# Altium PCB PWM_Controller_Half_Bridge.PcbDoc
Units mm, origin at the board's own origin, x right, y up, seen from the top; angles counter-clockwise.
Board outline 45 x 40 mm, 2 copper layers (Top Layer, Bottom Layer), stack 1.071 mm thick; 62 components, 23 nets, 137 pads, 15 vias.
Unrouted connection lines stored in the file: 29.
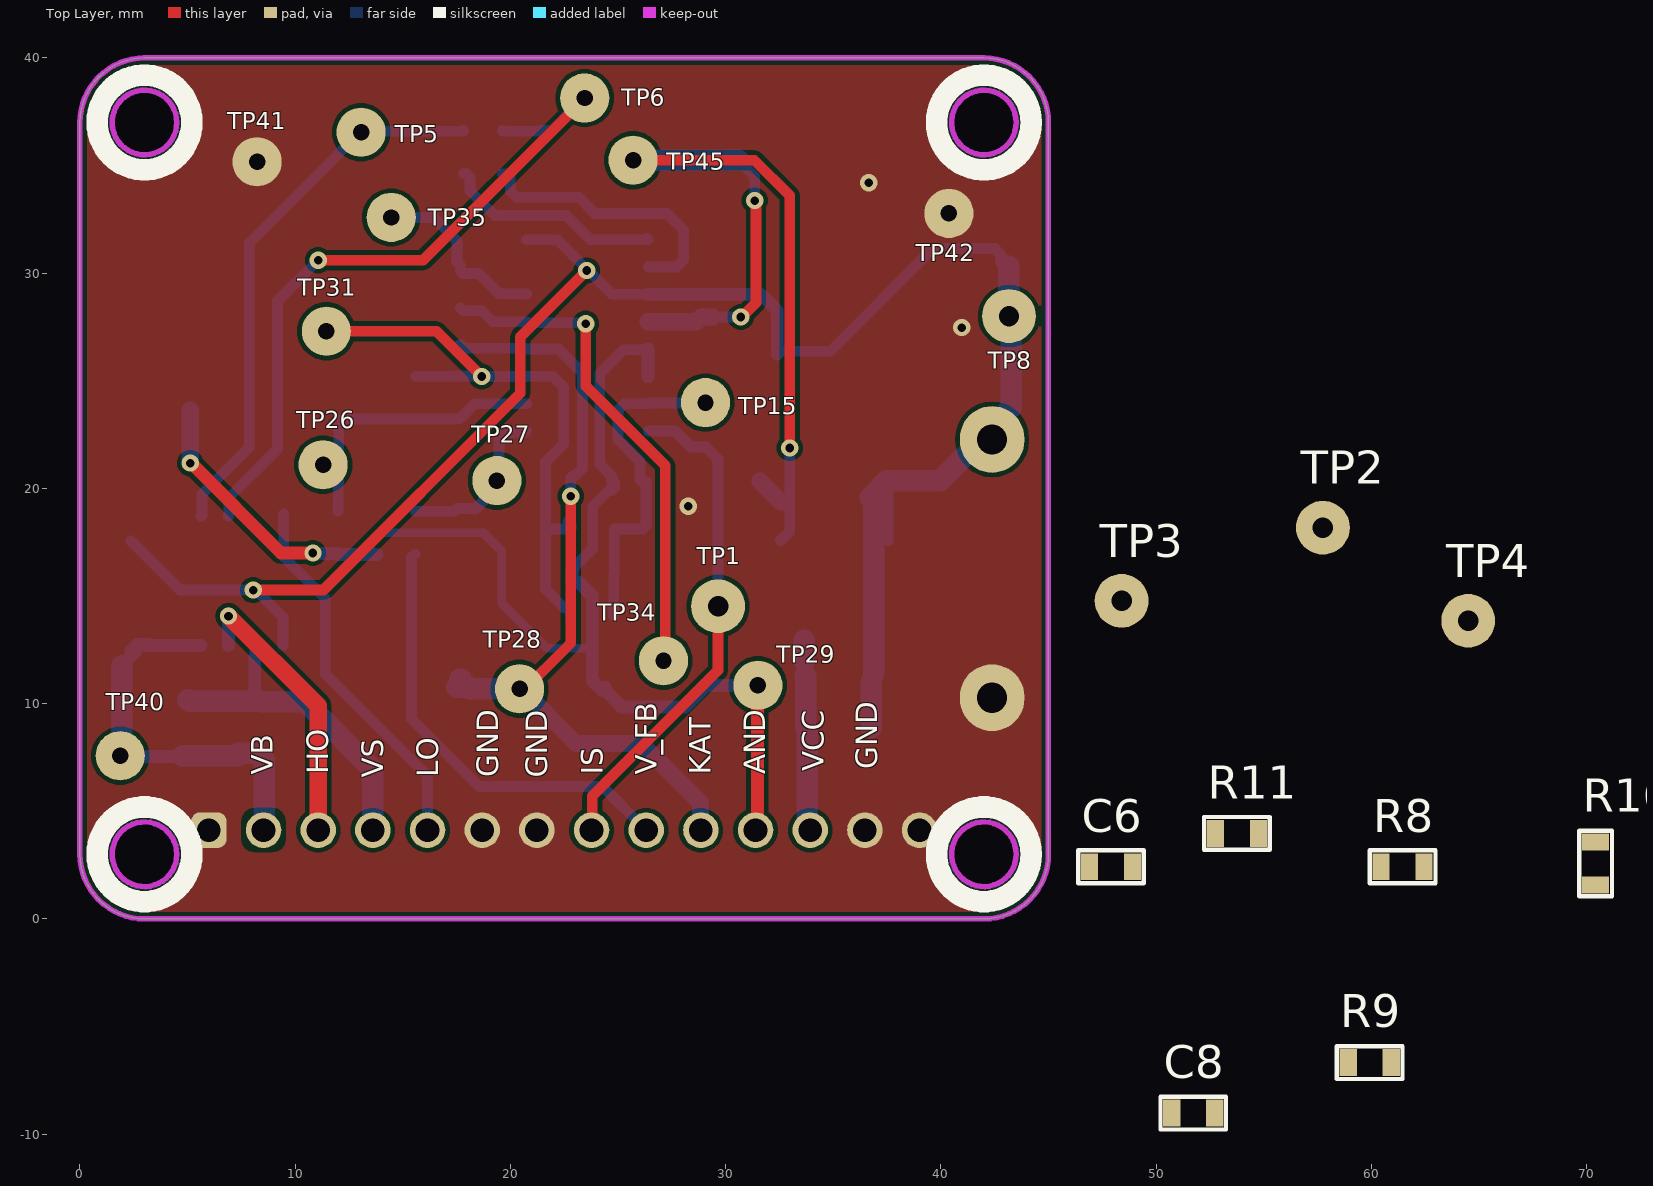
[diagram p0: Top Layer view]
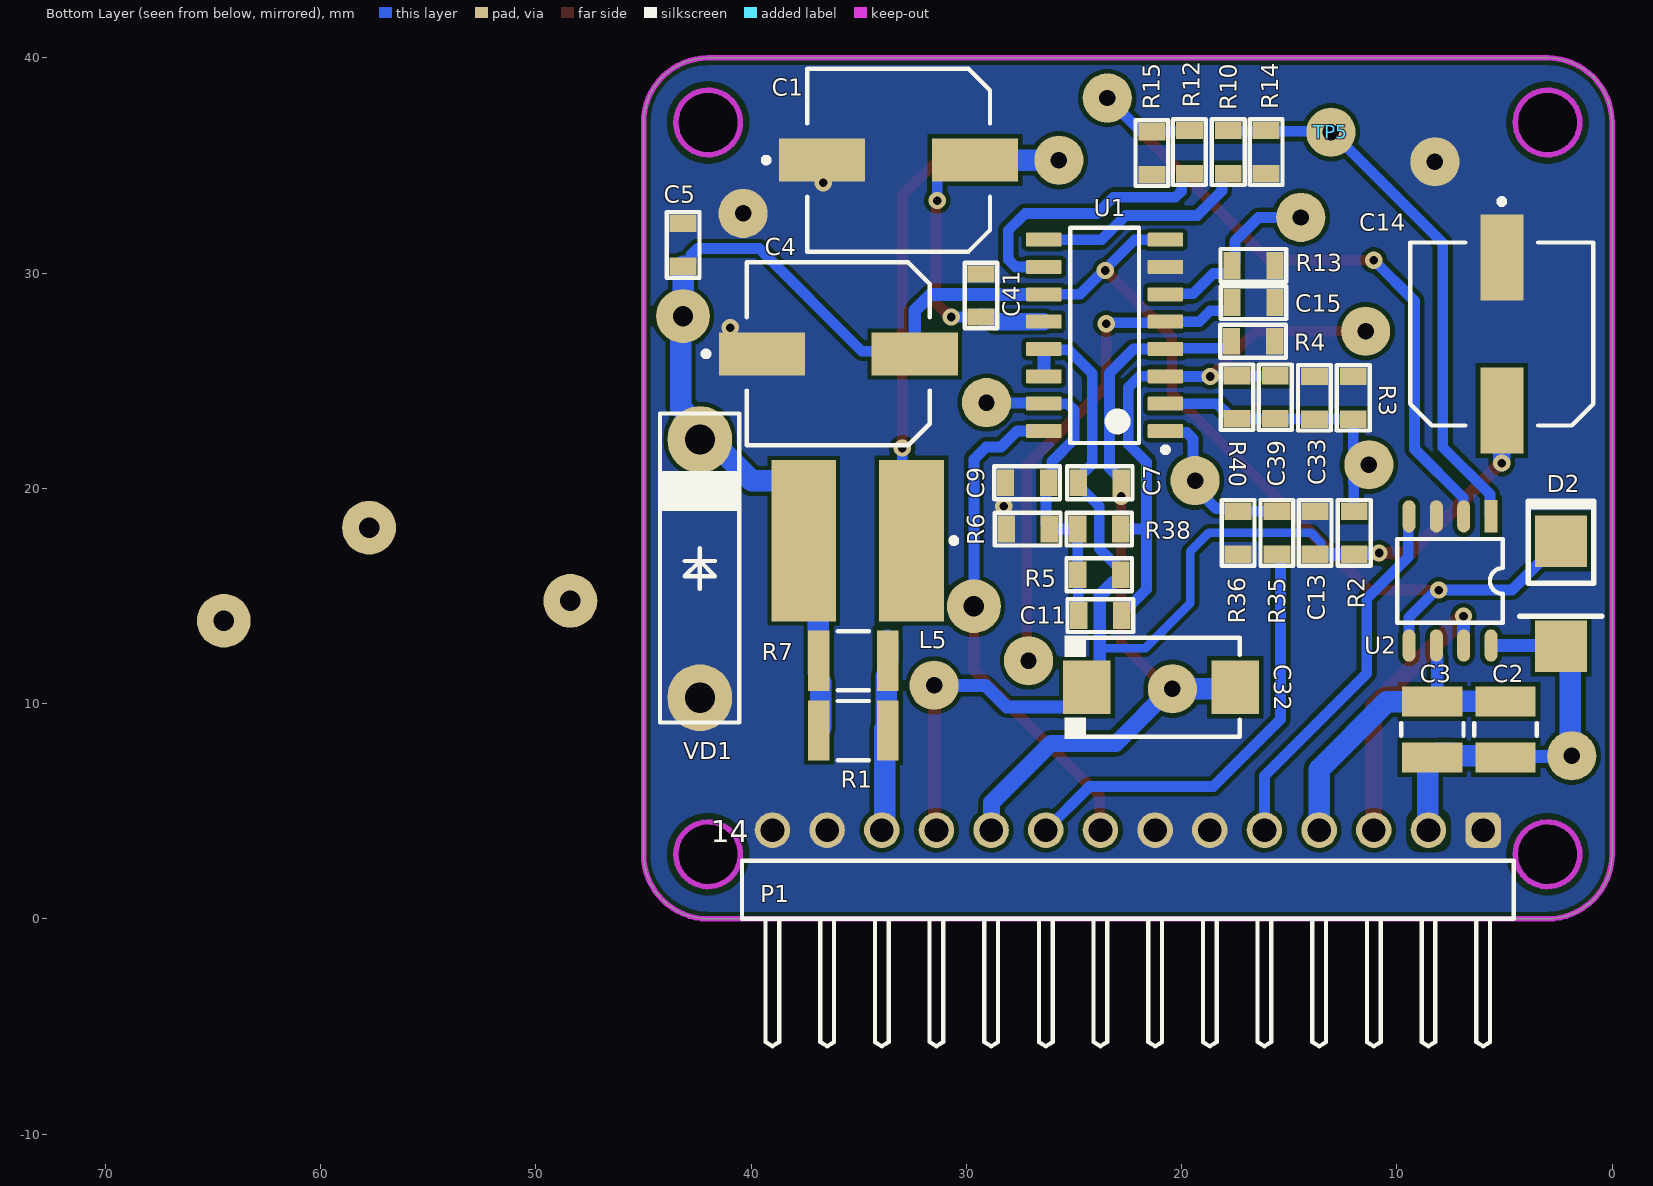
[diagram p1: Bottom Layer view, seen from below]

## Layer stack, top to bottom
Top Solder: solder mask 0.0102, Solder Resist, Dk 3.5
Top Layer: signal copper 0.0356
Dielectric 1: dielectric 1, FR-4, Dk 4.8
Bottom Layer: signal copper 0.0356
Bottom Solder: solder mask 0.0102, Solder Resist, Dk 3.5

## Board outline
0,3 0,37 cw(c3,37) 3,40 42,40 cw(c42,37) 45,37 45,3.05 45,3 cw(c42,3) 42,0 42.029,0 2.999,0 3,0 cw(c3,3)
cut-out: 40.5,3 ccw(c42,3) 42,1.5 ccw(c42,3) 43.5,3 ccw(c42,3) 42,4.5 ccw(c42,3)
cut-out: 1.5,3 ccw(c3,3) 3,1.5 ccw(c3,3) 4.5,3 ccw(c3,3) 3,4.5 ccw(c3,3)
cut-out: 1.5,37 ccw(c3,37) 3,35.5 ccw(c3,37) 4.5,37 ccw(c3,37) 3,38.5 ccw(c3,37)
cut-out: 40.5,37 ccw(c42,37) 42,35.5 ccw(c42,37) 43.5,37 ccw(c42,37) 42,38.5 ccw(c42,37)

## Design rules (kind name [scope] priority, off if disabled: settings)
Clearance Clearance_1 [All vs InNet('GND_1')] p1: gap=0.2 ignorepadtopadclearanceinfootprint=FALSE
Clearance [All vs InNet('GND')] p2: gap=0.2 ignorepadtopadclearanceinfootprint=FALSE except(0.4: Fill-Fill Fill-Poly Fill-Region Fill-Text Fill-Hole Poly-Poly Poly-Region Poly-Text Poly-Hole Region-Region Region-Text Region-Hole)
ComponentClearance [All] p1: gap=-3 collisioncheckmode=3 verticalgap=0.254 showdistances=FALSE
DiffPairsRouting [All] p1: maxlimit=0.254 minlimit=0.254 mostfreqgap=0.254 substack1={A23D90DD-733B-49C5-8102-56B3D284E3A0} toplayer_{a23d90dd-733b-49c5-8102-56b3d284e3a0}_minwidth=0.381 toplayer_{a23d90dd-733b-49c5-8102-56b3d284e3a0}_maxwidth=0.381 toplayer_{a23d90dd-733b-49c5-8102-56b3d284e3a0}_prefwidth=0.381 bottomlayer_{a23d90dd-733b-49c5-8102-56b3d284e3a0}_minwidth=0.381 bottomlayer_{a23d90dd-733b-49c5-8102-56b3d284e3a0}_maxwidth=0.381 bottomlayer_{a23d90dd-733b-49c5-8102-56b3d284e3a0}_prefwidth=0.381 toplayer_minwidth=0.381 toplayer_maxwidth=0.381 toplayer_prefwidth=0.381 bottomlayer_minwidth=0.381 bottomlayer_maxwidth=0.381 bottomlayer_prefwidth=0.381 substack2={0B3DB408-A969-412D-8C07-BA8AE97219D9} toplayer_{0b3db408-a969-412d-8c07-ba8ae97219d9}_minwidth=0.381 toplayer_{0b3db408-a969-412d-8c07-ba8ae97219d9}_maxwidth=0.381 toplayer_{0b3db408-a969-412d-8c07-ba8ae97219d9}_prefwidth=0.381 bottomlayer_{0b3db408-a969-412d-8c07-ba8ae97219d9}_minwidth=0.381 bottomlayer_{0b3db408-a969-412d-8c07-ba8ae97219d9}_maxwidth=0.381 bottomlayer_{0b3db408-a969-412d-8c07-ba8ae97219d9}_prefwidth=0.381 substack3={378827E6-B38F-4565-9D2F-710D8D441C30} toplayer_{378827e6-b38f-4565-9d2f-710d8d441c30}_minwidth=0.381 toplayer_{378827e6-b38f-4565-9d2f-710d8d441c30}_maxwidth=0.381 toplayer_{378827e6-b38f-4565-9d2f-710d8d441c30}_prefwidth=0.381 bottomlayer_{378827e6-b38f-4565-9d2f-710d8d441c30}_minwidth=0.381 bottomlayer_{378827e6-b38f-4565-9d2f-710d8d441c30}_maxwidth=0.381 bottomlayer_{378827e6-b38f-4565-9d2f-710d8d441c30}_prefwidth=0.381 substack4={1E65D4A7-266F-4925-B814-5E9C4A66F8EE} toplayer_{1e65d4a7-266f-4925-b814-5e9c4a66f8ee}_minwidth=0.381 toplayer_{1e65d4a7-266f-4925-b814-5e9c4a66f8ee}_maxwidth=0.381 toplayer_{1e65d4a7-266f-4925-b814-5e9c4a66f8ee}_prefwidth=0.381 bottomlayer_{1e65d4a7-266f-4925-b814-5e9c4a66f8ee}_minwidth=0.381 bottomlayer_{1e65d4a7-266f-4925-b814-5e9c4a66f8ee}_maxwidth=0.381 bottomlayer_{1e65d4a7-266f-4925-b814-5e9c4a66f8ee}_prefwidth=0.381 substack5={93C5D03E-862D-45F8-9871-970EEA9B3F11} toplayer_{93c5d03e-862d-45f8-9871-970eea9b3f11}_minwidth=0.381 toplayer_{93c5d03e-862d-45f8-9871-970eea9b3f11}_maxwidth=0.381 toplayer_{93c5d03e-862d-45f8-9871-970eea9b3f11}_prefwidth=0.381 bottomlayer_{93c5d03e-862d-45f8-9871-970eea9b3f11}_minwidth=0.381 bottomlayer_{93c5d03e-862d-45f8-9871-970eea9b3f11}_maxwidth=0.381 bottomlayer_{93c5d03e-862d-45f8-9871-970eea9b3f11}_prefwidth=0.381 maxuncoupledlength=12.7
Height [All] p1: minheight=0 maxheight=50 prefheight=33
HoleSize [All] p1: absolutevalues=TRUE maxlimit=6 minlimit=0.01 maxpercent=80.000 minpercent=20.000
HoleToHoleClearance [All] p1: gap=0.1 allowstackedmicrovias=TRUE
MinimumSolderMaskSliver [All] p1: minsoldermaskwidth=0.1
PlaneClearance [All] p1: clearance=0.7
PlaneConnect [All] p1: planeconnectstyle=Direct reliefexpansion=0.5 reliefentries=4 reliefconductorwidth=0.5 reliefairgap=0.15
PolygonConnect VQFN20 [HasFootprint('VQFN20')] p1: connectstyle=Direct reliefconductorwidth=0.254 reliefentries=4 polygonreliefangle="90 Angle" airgapwidth=0.254
PolygonConnect [All] p2: connectstyle=Direct reliefconductorwidth=0.3 reliefentries=4 polygonreliefangle="90 Angle" airgapwidth=0.15
RoutingVias [All] p1: holewidth=0.1 width=0.1 viastyle="Through Hole" minholewidth=0 minwidth=0.3 maxholewidth=2 maxwidth=4
ShortCircuit [All] p1: allowed=TRUE
SilkToSolderMaskClearance [IsPad] p1: minsilkscreentomaskgap=0.1 clearancetoexposedcopper=TRUE
SolderMaskExpansion SolderMaskExpansion_Via [IsVia] p1: expansion=0.102 istentingtop=TRUE
SolderMaskExpansion [All] p2: expansion=0.01 istentingtop=FALSE
UnRoutedNet [All] p1: checkbadconnections=TRUE
Width [All] p1: maxlimit=5 minlimit=0.2 preferedwidth=0.3 substack1={A23D90DD-733B-49C5-8102-56B3D284E3A0} substack2={0B3DB408-A969-412D-8C07-BA8AE97219D9} substack3={378827E6-B38F-4565-9D2F-710D8D441C30} substack4={1E65D4A7-266F-4925-B814-5E9C4A66F8EE} substack5={93C5D03E-862D-45F8-9871-970EEA9B3F11}
19 further rules are at their usual default settings.

## Components (designator, comment, footprint, x,y, rotation, side; value= is the part's Value field where it differs from the comment)
C1 "CAP-POLAR" SIZE_EEE 33.15,35.25 r180 bottom locked
C2 "0.22uF" FP-C1210X475K5RACTU-IPC_C 4.95,8.8 r270 bottom
C3 "0.22uF" FP-C1210X475K5RACTU-IPC_C 8.35,8.8 r270 bottom
C4 "CAP-POLAR" SIZE_EEE 35.95,26.25 r180 bottom locked
C5 "0.1uF" CAP-0805 43.166,31.317 r270 bottom
C6 "CAP-NON-POLAR" CAP-0805 47.904,2.42 r0 top
C7 "CAP-NON-POLAR" CAP-0805 23.802,20.261 r0 bottom
C8 "CAP-NON-POLAR" CAP-0805 51.729,-9.025 r0 top
C9 "CAP-NON-POLAR" CAP-0805 27.178,20.261 r180 bottom
C11 "2.2nF 16V" CAP-0805 23.777,14.086 r0 bottom
C13 "0.1uF" CAP-0805 13.802,17.936 r270 bottom
C14 "CAP-POLAR" SIZE_EEE 5.125,27.175 r270 bottom locked
C15 "2.2nF 16V" CAP-0805 16.665,28.63 r0 bottom
C32 "CAP-POLAR" CAP-TAN-D 20.952,10.761 r180 bottom locked
C33 "CAP-NON-POLAR" CAP-0805 13.827,24.211 r270 bottom
C39 "2.2nF 16V" CAP-0805 15.652,24.236 r270 bottom
C41 "0.1uF" CAP-0805 29.321,28.961 r270 bottom
D2 "US1G" DO-214AA 2.375,13.05 r90 bottom
L5 "47µH, 1.17A" WE-PD2_7850 35.05,17.575 r0 bottom
P1 "61301411021" 61301411021 22.5,1.35 r180 bottom
R1 "51" FP-RMCF1210-MFG 35.25,8.75 r180 bottom
R2 "10K**" RES-0805 11.977,17.936 r90 bottom
R3 "2K" RES-0805 12.027,24.211 r90 bottom
R4 "10K" RES-0805 16.677,26.836 r180 bottom
R5 "2K**" RES-0805 23.827,15.986 r0 bottom
R6 "2K" RES-0805 27.152,18.111 r0 bottom
R7 "51" FP-RMCF1210-MFG 35.25,11.993 r180 bottom
R8 "2K" RES-0805 61.455,2.42 r0 top
R9 "30K" RES-0805 59.925,-6.675 r0 top
R10 "2K" RES-0805 17.835,35.623 r90 bottom
R11 "10K" RES-0805 53.754,3.97 r0 top
R12 "2K" RES-0805 19.635,35.623 r90 bottom
R13 "10K" RES-0805 16.665,30.361 r180 bottom
R14 "1K" RES-0805 16.077,35.623 r270 bottom
R15 "1K" RES-0805 21.385,35.573 r270 bottom
R16 "10K" RES-0805 70.425,2.575 r90 top
R35 "47K**" RES-0805 15.577,17.936 r90 bottom
R36 "2K" RES-0805 17.377,17.936 r270 bottom
R38 "1M" RES-0805 23.827,18.111 r180 bottom
R40 "1M" RES-0805 17.427,24.236 r90 bottom
TP1 "" Test_Point#1 29.65,14.527 r0 top
TP2 "" Test_Point#1 57.75,18.175 r0 top
TP3 "" Test_Point#1 48.4,14.775 r0 top
TP4 "" Test_Point#1 64.5,13.85 r0 top
TP5 "" Test_Point#2 13.065,36.546 r180 bottom
TP6 "" Test_Point#2 23.452,38.137 r0 top
TP8 "" Test_Point#1 43.166,28.005 r0 top
TP15 "" Test_Point#2 29.066,23.986 r0 top
TP26 "" Test_Point#2 11.3,21.1 r0 top
TP27 "" Test_Point#2 19.375,20.361 r0 top
TP28 "" Test_Point#2 20.427,10.686 r90 top
TP29 "" Test_Point#2 31.5,10.85 r90 top
TP31 "" Test_Point#2 11.45,27.3 r90 top
TP34 "" Test_Point#2 27.114,11.993 r90 top
TP35 "" Test_Point#2 14.463,32.588 r90 top
TP40 "" Test_Point#2 1.875,7.575 r90 top
TP41 "" Test_Point#2 8.23,35.175 r0 top
TP42 "" Test_Point#2 40.375,32.775 r0 top
TP45 "" Test_Point#2 25.7,35.25 r90 top
U1 "TL494" SOIC-16-M 23.577,27.111 r0 bottom
U2 "IR2181" SO8-150 7.525,15.7 r270 bottom
VD1 "15V" DO-017AA 42.383,16.275 r270 bottom

## Footprints (in the part's own frame and the unit in brackets; to place one, negate y for a bottom-side part, rotate by r counter-clockwise, add the part's x,y. Pads: shape width x height; smd on the part's side, far side on the other; paste and mask are expansions set on the pad)
61301411021 [mm] "Pin Header, pitch 2.54 mm, THT, Angled, single row, 14p"
  rrect50% 1.65x1.65 hole 1.1: 1(16.51,2.77)
  round 1.65 hole 1.1: 2(13.97,2.77) 3(11.43,2.77) 4(8.89,2.77) 5(6.35,2.77) 6(3.81,2.77) 7(1.27,2.77) 8(-1.27,2.77) 9(-3.81,2.77) 10(-6.35,2.77) 11(-8.89,2.77) 12(-11.43,2.77) 13(-13.97,2.77) 14(-16.51,2.77)
  silkscreen extent -17.93,-7.27 17.93,1.35, body extent -17.78,-7.27 17.78,3.09, height 2.58
CAP-0805 [mm]
  rect 0.8x1.25 smd mask+0.015: 1(-1,0) 2(1,0)
  silkscreen extent -1.52,-0.76 1.52,0.76, body extent -1,-0.62 1,0.63, height 0.8
CAP-TAN-D [mm]
  rect 2.2x2.5 smd: 1(-3.45,0) 2(3.45,0)
  silkscreen extent -4.5,-2.4 3.65,2.4, body extent -3.8,-2.3 3.8,2.3, height 4
DO-017AA [mm]
  oval 3.1x3 hole 1.4: 1(-6,0) 2(6,0)
  silkscreen extent -7.2,-1.85 7.15,1.83, body extent -6.63,-1.7 6.37,1.7, height 3.4
DO-214AA [mm]
  rect 2.4x2.4 smd: 1(-0.381,0) 2(4.5,0)
  silkscreen extent 1.02,-1.91 6.35,1.91, body extent -0.75,-1.97 4.85,1.97, height 2.65
FP-C1210X475K5RACTU-IPC_C [mm]
  rect 1.403x2.804 smd paste+0 mask+0: 1(-1.3,0) 2(1.3,0)
  silkscreen extent -0.3,-1.45 0.3,1.45, body extent -1.65,-1.3 1.65,1.3, height 2.8
FP-RMCF1210-MFG [mm]
  rect 1x2.8 smd paste+0 mask+0: 1(-1.6,0) 2(1.6,0)
  silkscreen extent -0.72,-1.38 0.72,1.38, body extent -1.6,-1.25 1.6,1.25, height 0.7
RES-0805 [mm]
  rect 0.8x1.25 smd mask+0.015: 1(-1,0) 2(1,0)
  silkscreen extent -1.52,-0.76 1.52,0.76, body extent -1,-0.62 1,0.63, height 0.6
SIZE_EEE [mm]
  rect 4x2 smd paste+0 mask+0: 1(3.55,0) 2(-3.55,0)
  silkscreen extent -6.28,-4.25 4.25,4.25, body extent -4.5,-4.15 4.5,4.15, height 6.5
SO8-150 [mm]
  rect 1.5x0.6 smd: 1(-3,1.9)
  oval 1.5x0.6 smd: 2(-3,0.63) 3(-3,-0.64) 4(-3,-1.91) 5(3,-1.91) 6(3,-0.64) 7(3,0.63) 8(3,1.9)
  silkscreen extent -1.95,-2.45 1.95,2.45, body extent -3,-2.45 3,2.45, height 1.7
SOIC-16-M [mm]
  rrect15% 1.65x0.65 smd: 1(-2.825,4.445) 2(-2.825,3.175) 3(-2.825,1.905) 4(-2.825,0.635) 5(-2.825,-0.635) 6(-2.825,-1.905) 7(-2.825,-3.175) 8(-2.825,-4.445) 9(2.825,-4.445) 10(2.825,-3.175) 11(2.825,-1.905) 12(2.825,-0.635) 13(2.825,0.635) 14(2.825,1.905) 15(2.825,3.175) 16(2.825,4.445)
  silkscreen extent -2.95,-5 1.6,5.44, body extent -3,-4.95 3,4.95, height 1.59
Test_Point#1 [mm]
  round 2.5 hole 0.95: 1(0,0)
Test_Point#2 [mm]
  round 2.286 hole 0.762 paste-2539.97 mask+0.102: 1(0,0)
WE-PD2_7850 [mm] "SMD Power Inductor, 2-Leads, body 7.8x7mm"
  rect 3x7.5 smd: 1(-2.5,0) 2(2.5,0)
  silkscreen extent -4.59,-0.12 -4.34,0.12, body extent -3.81,-3.5 3.81,3.5, height 4.95

## Part data
C2 C3: library part CAP_1210
C5 C11 C13 C15 C39 C41: library part CAP-NON-POLAR
L5: library part 744775147, "WE-PD2 SMT Power Inductor, size 7850, 47µH, 1.17A, 0.18Ω", Case/Size Code=7850, DC Resistance=0.134Ω, DC Resistance Max=0.18Ω, Inductance=47µH, Manufacturer="Wurth Elektronik", Operating Temperature Max=125°C, Operating Temperature Min=-40°C, Rated Current=1.17A, Saturation Current=1.24A, Self Resonant Frequency=12MHz, Category="Unshielded Power Inductors", ComponentLink1Description="Website Link", ComponentLink1URL=https://www.we-online.com/redexpert/article/744775147?ad, ComponentLink2Description="Datasheet Link", ComponentLink2URL=https://www.we-online.com/redexpert/spec/744775147?ad, Height=4.95mm, Length=7.8mm, Manufacturer Part Number=744775147, Match Code=WE-PD2, Mount="Surface Mount", Packaging="Tape and Reel", Width=7mm, Simulation ModelName=7850_744775147_47u, Simulation ModelText=".subckt 7850_744775147_47u 1 2 / Rp 1 2 40000 / Cp 1 2 4p / Rs 1 N3 0.1343 / L1 N3 2 47u / .ends 7850_744775147_47u", Simulation PortMap=(1:1),(2:2)
P1: "WR-PHD Pin Header, THT, Angled, pitch 2.54mm, 1 Row, 14P", Contact Resistance=20mΩ, Manufacturer="Wurth Elektronik", Operating Temperature Max=105°C, Operating Temperature Min=-40°C, Rated Current=3A, Withstanding Voltage=500V, Working Voltage=250V, Category="Board-to-Board Connectors", ComponentLink1Description="Website Link", ComponentLink1URL=https://www.we-online.com/redexpert/article/61301411021?ad, ComponentLink2Description="Datasheet Link", ComponentLink2URL=https://www.we-online.com/redexpert/spec/61301411021?ad, Gender="Pin Header", Manufacturer Part Number=61301411021, Match Code=WR-PHD, Mount="Through Hole", Number of Pins=14, Number of Rows=1, Orientation=Angled, Packaging=Bag, Pitch=2.54mm
R1 R7: library part CMP-26527-006785-1, "51Ω ±5% 0.5W 1210 Thick Film Chip Resistor AEC-Q200 compliant", Case Code (Imperial)=1210, Case Code (Metric)=3225, Max Operating Temperature=155°C, Max Power Dissipation=500mW, Min Operating Temperature=-55°C, Resistance=51R, Resistor Type="Thick Film", Temperature Coefficient=200ppm/°C, Tolerance=5%, Case/Package=1210, Contact Plating=Tin, Features="Automotive AEC-Q200", Height=0.028inch, Lead Free="Lead Free", Length=0.126inch, Mount="Surface Mount", Number of Terminations=2, Packaging="Tape and Reel", Radiation Hardening=No, RoHS Compliant=Yes, Series=RMCF, Width=0.098inch
R2: library part RES-CONST, "10K"
R3 R4 R6 R8 R9 R10 R11 R12 R13 R14 R15 R16 R36 R38 R40: library part RES-CONST
R5: library part RES-CONST, "2K"
R35: library part RES-CONST, "47K"
TP1 TP2 TP3 TP4 TP5 TP6 TP8 TP15 TP26 TP27 TP28 TP29 TP31 TP34 TP35 TP40 TP41 TP42 TP45: library part TP_PCB?, "Test_Point"
U1: "TL494 Pwm controller"
U2: "IR2181 Driver"
VD1: library part ZENER

## Via types
v1: diameter 0.8, hole 0.4, Top Layer to Bottom Layer, tented both sides, 15 vias

## Nets (pads, with @x,y where several pads share a name; then routed paths per layer and width w, separated by ;. In a path a pad name is that pad's centre, name@x,y a point inside that pad or via, vN(x,y) a via of type N, cw(c..) or ccw(c..) an arc to the next point about the centre after c; other vN are vias at no path point)
GND: C1.2 C4.2 C5.1 C6.1 C8.1 C9.1 C13.1 C14.2 C15.1 C33.1 C41.1 P1.5 P1.6 P1.12 R3.2 R4.2 R6.2 R9.1 R11.2 R13.2 R14.2 R15.2 R36.2 TP41.1 TP42.1 U1.7 U2.3 VD1.2
  other v1: 28.267,19.174 40.975,27.47 36.65,34.2
NetC1_1: C1.1 C41.2 L5.1 TP45.1 U1.12 | length 42.8
  Top Layer w0.5: TP45.1 31.333,35.25 32.975,33.608 v1(32.975,21.875) ; v1(30.708,27.961) 30.75,27.961 31.409,28.62 31.409,33.232 31.35,33.291 v1(31.35,33.372)
  Bottom Layer w0.5: C41.2@29.389,27.961 v1(30.708,27.961) ; C1.1@30.6,35.25 31.35,34.5 v1(31.35,33.372) ; L5.1 32.975,18 v1(32.975,21.875)
  Bottom Layer w0.8: U1.12 28.647,27.746 28.862,27.961 C41.2@29.389,27.961 ; L5.1@31.6,20.337 L5.1@32.575,19.362
  Bottom Layer w1: TP45.1 C1.1@30.6,35.25
NetC2_1: C2.1 C3.1 P1.3 R16.2 U2.6 | length 15.6
  Bottom Layer w0.58: U2.6@8.156,12.966 8.161,12.961 8.161,12.241 8.118,12.197 8.118,10.433 C3.1@8.35,10.2
  Bottom Layer w1: C2.1@5.018,10.168 5.085,10.1 8.45,10.1 8.463,10.088 10.462,10.088 13.61,6.94 13.61,4.12
NetC2_2: C2.2 C3.2 D2.1 TP40.1 U2.8 | length 18.6
  Bottom Layer w0.6: TP40.1 TP40.1@1.939,7.639 ; TP40.1@1.875,7.86 2.197,7.537 4.776,7.537 C2.2@4.788,7.55 ; D2.1@1.939,11.769 D2.1@2.604,12.434 ; D2.1@2.375,12.469 2.656,12.75 3.104,12.75 D2.1@3.234,12.75 ; D2.1@3.104,12.7 5.163,12.7 U2.8
  Bottom Layer w1: TP40.1@1.939,7.639 D2.1@1.939,11.769 ; C2.2@4.788,7.55 4.813,7.575 C3.2@7.357,7.575 ; C3.2@7.357,7.699 C3.2@8.118,7.699 ; C3.2@8.35,7.6 8.575,7.375 8.575,4.165 8.53,4.12
NetC4_1: C4.1 C5.2 D2.2 L5.2 R1.1 R7.1 TP8.1 U1.8 U1.11 U2.5 VD1.1 | length 88.9
  Top Layer w0.5: v1(8.05,15.275) 11.321,15.275 20.46,24.415 20.46,27.035 v1(23.55,30.125)
  Bottom Layer w0.5: D2.2 4.65,15.275 v1(8.05,15.275) 8.107,15.218 8.23,15.218 9.435,14.013 U2.5 ; U1.8 22.182,31.556 24.722,29.016 U1.11 ; C4.1 32.518,26.368 34.857,26.368 39.629,31.14 42.498,31.14 42.791,30.847 42.791,30.467 42.941,30.317 C5.2 ; L5.2 L5.2@37.55,20.347
  Bottom Layer w0.6: U1.11 31.645,29.016 32.4,28.261 C4.1
  Bottom Layer w1: L5.2@36.711,19.576 37.483,20.347 39.964,20.347 41.459,21.842 VD1.1@41.904,21.842 ; R1.1@36.775,8.881 R7.1@36.775,11.001 ; R7.1@36.875,11.445 L5.2@36.875,19.438 ; VD1.1 42.383,22.866 43.275,23.758 43.275,27.896 TP8.1 C5.2@43.166,30.317
NetC6_2: C6.2 R35.2 R36.1 TP27.1 U1.1 | length 8
  Bottom Layer w0.5: R35.2 R36.1 17.51,19.069 18.404,19.069 19.415,20.081 19.47,20.081 19.47,22.298 19.763,22.591 20.677,22.591 U1.1
NetC7_1: C7.1 C32.2 P1.10 R4.1 TP28.1 U1.4 | length 37.8
  Top Layer w0.5: TP28.1@20.411,10.419 22.802,12.81 v1(22.802,19.636)
  Bottom Layer w0.5: R4.1@17.665,26.686 17.665,26.673 17.827,26.511 U1.4@20.717,26.511 ; U1.4 22.237,26.476 23.352,25.361 23.352,20.937 23.001,20.586 22.902,20.586 22.802,20.486 C7.1 C7.1@22.802,19.636
  Bottom Layer w0.8: TP28.1@20.516,10.686 23.052,8.15 26.075,8.15 28.833,5.392 P1.10@28.833,4.137
  Bottom Layer w1: C32.2 C32.2@18.095,10.761 ; C32.2@17.727,11.136 17.645,11.136 18.095,10.686 TP28.1 ; P1.10@28.833,4.137 P1.10
NetC7_2: C7.2 C13.2 C14.1 C32.1 P1.9 R2.1 R5.1 TP29.1 U1.13 U1.14 | length 62.6
  Top Layer w0.6: v1@5.172,21.175 9.347,17 v1(10.825,17) ; 31.39,4.12 31.475,4.205 TP29.1@31.475,11.051
  Bottom Layer w0.4: C13.2@13.521,17.217 13.521,17.475 13.982,17.936 18.739,17.936 19.6,17.075 19.6,14.666 21.691,12.575 23.802,12.575
  Bottom Layer w0.5: R5.1@22.927,16.311 23.827,17.211 23.827,19.174 C7.2@24.589,19.936 ; C7.2 24.702,20.361 24.702,20.586 24.152,21.136 24.152,25.336 25.256,26.44 26.366,26.44 U1.13
  Bottom Layer w0.6: v1(10.825,17) 10.857,16.968 11.945,16.968 R2.1 C13.2 ; R5.1@22.927,16.311 R5.1 22.827,15.761 22.927,15.661 23.152,15.661 23.802,15.011 23.802,12.575 23.802,11.061 C32.1@24.252,10.611 ; C32.1 24.402,10.611 25.163,9.85 28.125,9.85 29.125,10.85 TP29.1 ; C7.2@24.702,19.936 24.802,20.036 C7.2 ; U1.14 U1.13
  Bottom Layer w0.8: v1(5.125,21.175) C14.1
NetC8_2: C8.2 R8.2 R9.2 TP1.1 U1.16
NetC9_2: C9.2 C11.2 R5.2 R6.1 R38.1 TP15.1 U1.15 | length 15.9
  Bottom Layer w0.5: C11.2 24.802,14.111 24.802,15.961 R5.2 R38.1 R6.1@25.927,18.111 ; R6.1 26.302,18.261 C9.2@26.302,20.311 ; C9.2 26.028,20.411 26.028,21.251 25.002,22.277 25.002,23.643 25.295,23.936 U1.15 26.427,23.961 28.688,23.961 28.777,24.05 29.413,24.05 TP15.1@29.477,23.986
NetC11_1: C11.1 C39.1 R38.2 R40.2 TP31.1 U1.3 | length 28.3
  Top Layer w0.5: TP31.1 16.568,27.3 v1(18.668,25.2)
  Bottom Layer w0.5: C39.1@15.616,25.206 17.427,25.206 17.439,25.218 18.65,25.218 v1(18.668,25.2) 18.671,25.203 20.749,25.203 U1.3 21.957,25.206 22.477,24.686 22.477,22.061 21.627,21.211 21.627,18.111 21.627,15.311 22.477,14.461 22.627,14.461 22.777,14.311 C11.1 ; 21.627,18.111 R38.2 22.827,18.336 R38.2@22.677,18.486
NetC15_2: C15.2 TP34.1 U1.5 | length 23.4
  Top Layer w0.5: v1(23.5,27.65) 23.5,24.758 27.195,21.063 TP34.1@27.195,11.91
  Bottom Layer w0.5: C15.2@17.677,28.393 17.815,28.255 18.668,28.255 19.177,27.746 U1.5 20.8,27.698 23.452,27.698 v1(23.5,27.65)
NetC33_2: C33.2 C39.2 R2.2 R3.1 R40.1 TP26.1 U1.2 | length 13.5
  Bottom Layer w0.5: TP26.1@11.375,20.875 TP26.1@11.421,20.921 ; R2.2 12.001,18.96 12.001,20.222 12.025,20.246 12.025,20.85 TP26.1@12.025,21.3 ; TP26.1@12.125,21.4 TP26.1@12.025,21.3 ; U1.2 18.351,23.936 17.802,23.387 17.652,23.236 R40.1 17.415,23.224 15.652,23.224 13.827,23.224 12.04,23.224 R3.1 12.025,23.209 TP26.1@12.025,21.3
NetP1_1: P1.1 P1.11 R1.2 R7.2 | length 8.2
  Bottom Layer w1: R7.2 R7.2@33.65,12.934 ; R7.2@33.7,11.306 33.725,11.281 R1.2@33.725,10.088 ; R1.2@33.725,10.018 33.725,8.895 33.795,8.825 33.795,4.715 33.806,4.704 33.806,4.244 33.93,4.12
NetP1_2: P1.2 R16.1 TP4.1 U2.7 | length 13
  Top Layer w0.8: v1(6.903,14.066) 11.07,9.898 11.07,4.12
  Bottom Layer w0.6: U2.7@6.903,12.708 v1(6.903,14.066)
NetP1_4: P1.4 R11.1 TP3.1 U2.4 | length 17.5
  Bottom Layer w0.5: U2.4@9.475,18.817 9.454,18.796 9.454,18.16 9.475,18.139 9.475,16.816 11.402,14.889 11.402,11.401 16.15,6.653 16.15,4.12
NetP1_7: P1.7 R8.1 TP2.1 | length 24.1
  Top Layer w0.5: 23.802,4.152 23.802,5.703 29.65,11.551 29.65,14.527
  Bottom Layer w0.5: 26.402,22.666 27.649,22.666 28.39,21.925 29.076,21.925 29.65,21.351 29.65,14.527 29.65,13.85
NetP1_8: P1.8 R35.1 | length 20.8
  Bottom Layer w0.5: R35.1 15.552,16.936 15.402,16.786 15.402,9.275 18.527,6.15 24.28,6.15 26.31,4.12
NetP1_13: P1.13 R10.2 R14.1 TP5.1 U2.1 | length 25.8
  Bottom Layer w0.5: U2.1 5.675,18.75 5.675,19.725 7.865,21.915 7.865,31.4 13.063,36.598 16.077,36.598 17.81,36.598 R10.2
NetP1_14: P1.14 R12.2 R15.1 TP6.1 U2.2 | length 33.7
  Top Layer w0.5: v1(11.07,30.597) 15.942,30.597 TP6.1@23.385,38.04
  Bottom Layer w0.5: U2.2 6.914,18.719 6.914,19.564 9.175,21.825 9.175,28.702 v1(11.07,30.597) ; R12.2 19.66,36.598 21.36,36.598 R15.1 21.435,36.623 21.938,36.623 TP6.1@23.577,38.262
NetR10_1: R10.1 U1.9 | length 10.3
  Bottom Layer w0.5: R10.1 17.974,34.623 18.124,34.473 18.124,33.826 19.27,32.68 22.598,32.68 23.722,31.556 U1.9 U1.9@26.352,31.606
NetR12_1: R12.1 U1.10 | length 13
  Bottom Layer w0.5: R12.1 19.848,34.623 19.998,34.473 19.998,33.818 20.291,33.525 23.175,33.525 23.925,32.775 27.269,32.775 28.05,31.994 28.05,30.634 27.702,30.286 U1.10
NetR13_1: R13.1 TP35.1 U1.6 | length 8.2
  Bottom Layer w0.5: TP35.1 16.424,32.588 17.515,31.496 17.515,30.511 R13.1 ; R13.1@17.677,30.125 17.815,29.986 18.529,29.986 19.47,29.045 20.723,29.045 U1.6

## Polygon pours and split planes (outlines as drawn)
GND on Bottom Layer "NONET_L-01_P-001" (solid, pour order 0): -0.075,0 0,0.075 0,40 45,40 45,0.005
GND on Top Layer "NONET_L-01_P-001" (solid, pour order 1): -0.075,0 0,0.075 0,40 45,40 45,0.005

## Keep-outs
Keep-Out Layer:
  circle w0.254: c42,3 r1.5
  circle w0.254: c3,37 r1.5
  circle w0.254: c3,3 r1.5
  circle w0.254: c42,37 r1.5
  lines w0.254: 2.963,40 42.017,40 ; 2.999,0 42.029,0 ; 3,0 cw(c3,3) 0,3 0,37 cw(c3,37) 3,40 ; 42,0 ccw(c42,3) 45,3 ; 42,40 cw(c42,37) 45,37 45,3.05

## Silkscreen, mask and mechanical layers (free items; w line width, h text height)
Top Overlay:
  circle w1: c42,3 r2.2
  circle w1: c42,37 r2.2
  circle w1: c3,3 r2.2
  circle w1: c3,37 r2.2
  text "GND" at 37.041,6.94 h1 r90
  text "VCC" at 34.571,6.852 h1 r90
  text "HO" at 11.531,6.728 h1 r90
  text "AND" at 31.851,6.728 h1 r90
  text "VB" at 8.969,6.686 h1 r90
  text "IS" at 24.298,6.686 h1 r90
  text "V_FB" at 26.792,6.686 h1 r90
  text "KAT" at 29.321,6.686 h1 r90
  text "LO" at 16.638,6.577 h1 r90
  text "GND" at 19.446,6.577 h1 r90
  text "VS" at 14.096,6.544 h1 r90
  text "GND" at 21.703,6.544 h1 r90

## Text inside footprints (layer, text, board x,y; h text height)
P1: Bottom Overlay "14" at 41.88,3.55 h1.02